# EAGLE board eBookReader (EAGLE 9.7.0)
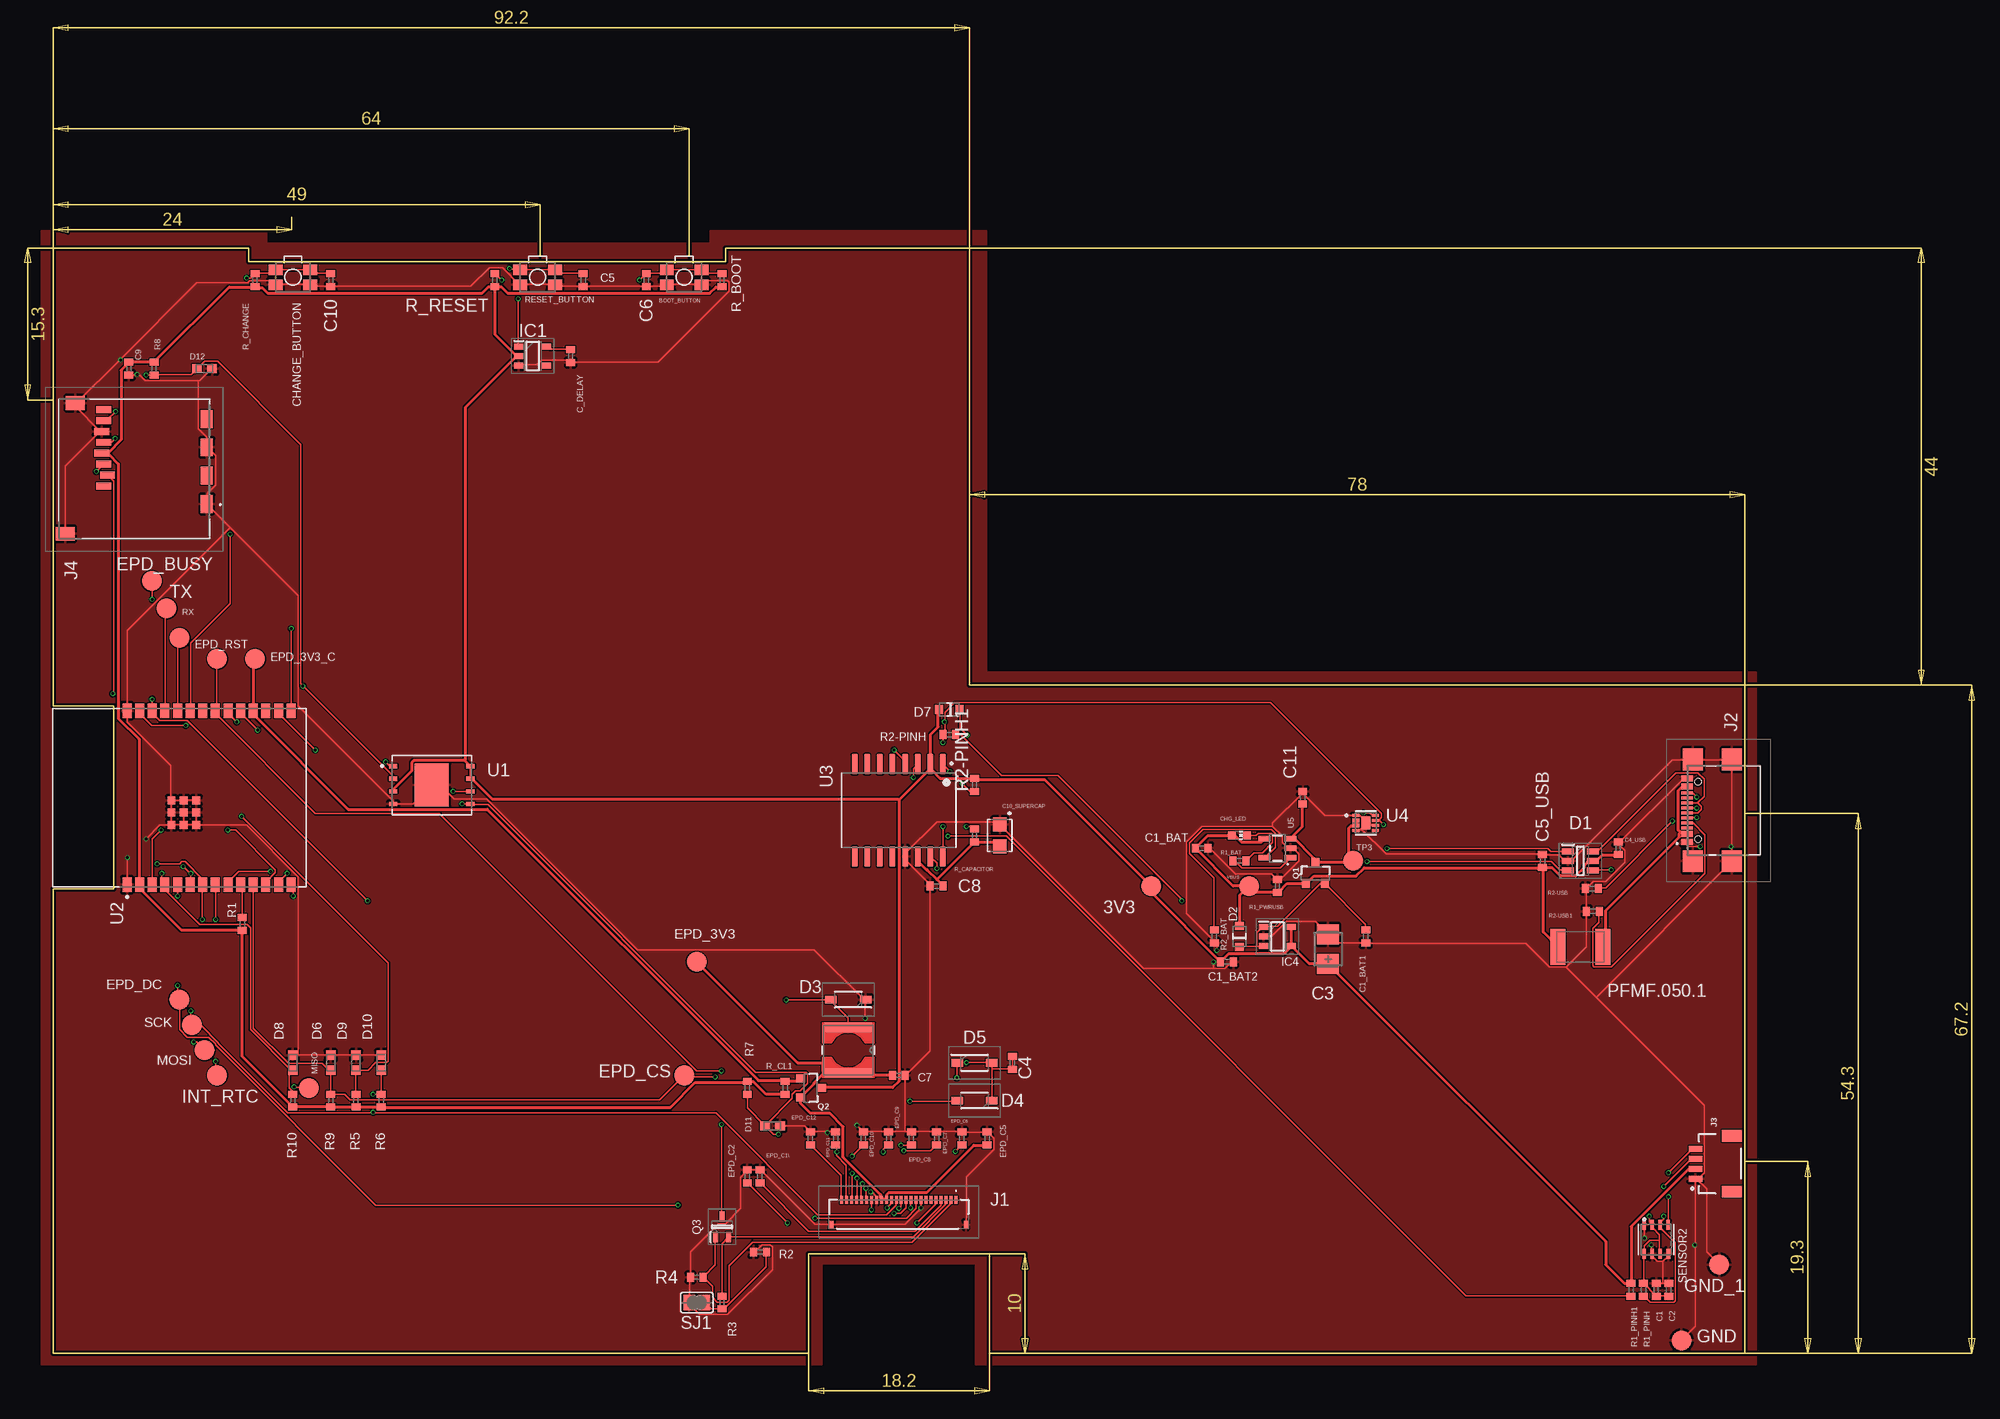
[diagram p0: board, top side]
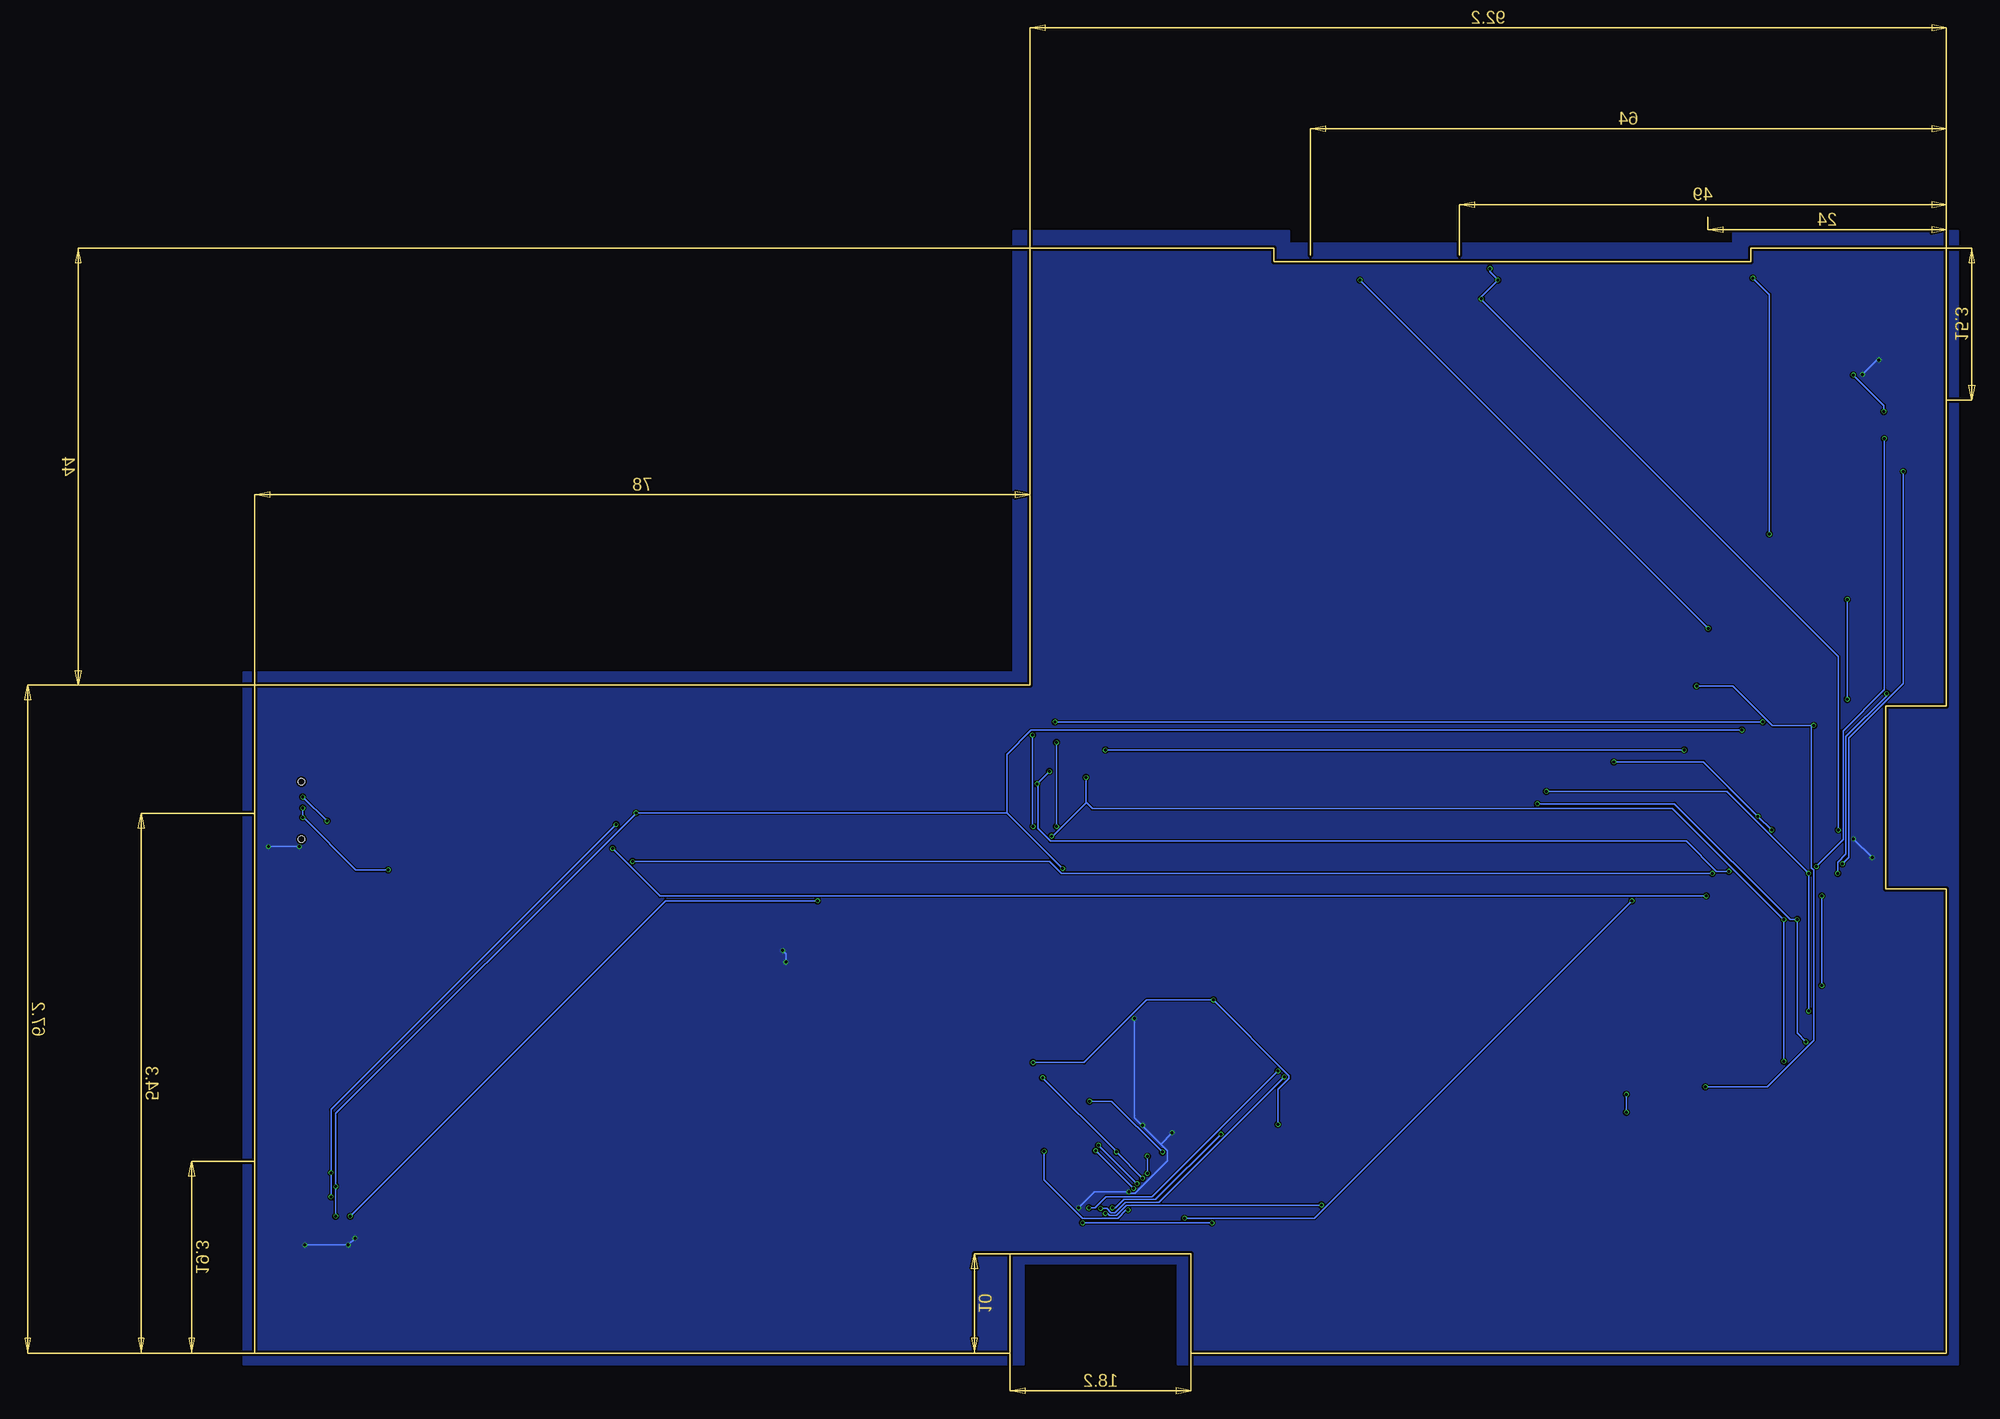
[diagram p1: board, bottom side, seen from below]

Size 170.2 x 111.2 mm. Coordinates in mm from the lower left corner, seen from the top.
Outline: 0,111.2 19.68,111.2 19.68,109.8 67.66,109.8 67.66,111.2 92.2,111.2 92.2,67.2 170.2,67.2 170.2,0 94.2,0 94.2,10 76,10 76,0 0,0 0,46.7 6.1,46.7 6.1,65.12 0,65.12 0,111.2
Copper layers (1*16): Top 0.035mm / dielectric 1.6mm / Bottom 0.035mm
Design rules "jlcpcb-2layers.dru *": minimum track width 0.15mm, minimum drill 0.3mm, track to track 5mil, track to pad 5mil, pad to pad 5mil, via to via 5mil, smd to smd 5mil, copper to edge 0.2mm, drill to drill 6mil, minimum pad ring 10mil, minimum via ring 3mil, stop-mask expansion 4mil, vias tented up to drill 0mil, thermal gap 10mil
Net classes: 1 custom: width 0.3 mm

## Footprints (pad centres in the part's own frame; a part is rotated, then mirrored left to right if it is on the bottom)
TP20R = smd 2 x 2: TP 0,0
MYBUTTON = smd 1.4 x 1.05: 1 1.75,0.75; 2 -1.75,0.75; 3 -1.75,-0.75; 4 1.75,-0.75
ESP32_WROVER_EAGLE-LTSPICE_C0402 = smd 0.7 x 0.9: 1 -0.65,0; 2 0.65,0
RCL_CT3528 = smd 2 x 2.2: + -1.5,0; - 1.5,0
CAPCP3225X100N = smd 1.4 x 1.4: 1 -1.1,0; 2 1.1,0
ADAFRUIT_CHIP-LED0603 = smd 0.8 x 0.8: A 0,-0.75; C 0,0.75
SOT95P280X145-6N = smd 1.2 x 0.6: 1 -1.25,0.95; 2 -1.25,0; 3 -1.25,-0.95; 4 1.25,-0.95; 5 1.25,0; 6 1.25,0.95
ESP32_WROVER_AVX---SD0805S020S1R0_AVX_SD0805S020S1R0_0 = smd 0.8 x 0.9: 1 -1.05,0; 2 1.05,0
SOD3716X135N = smd 1.15 x 0.8: 1 -1.75,0; 2 1.75,0
DIOC1608X36N = smd 0.97 x 0.94: 1 -0.75,0; 2 0.75,0
SOT95P280X125-5N = smd 0.9 x 0.6: 1 -1.4,0.95; 2 -1.4,0; 3 -1.4,-0.95; 4 1.4,-0.95; 5 1.4,0.95
SOT95P280X120-5N = smd 0.9 x 0.6: 1 -1.4,0.95; 2 -1.4,0; 3 -1.4,-0.95; 4 1.4,-0.95; 5 1.4,0.95
FH34SRJ24S05SH99 = smd 0.3 x 0.8: 1 5.75,1.45; 2 5.25,1.45; 3 4.75,1.45; 4 4.25,1.45; 5 3.75,1.45; 6 3.25,1.45; 7 2.75,1.45; 8 2.25,1.45; 9 1.75,1.45; 10 1.25,1.45; 11 0.75,1.45; 12 0.25,1.45; 13 -0.25,1.45; 14 -0.75,1.45; 15 -1.25,1.45; 16 -1.75,1.45; 17 -2.25,1.45; 18 -2.75,1.45; 19 -3.25,1.45; 20 -3.75,1.45; 21 -4.25,1.45; 22 -4.75,1.45; 23 -5.25,1.45; 24 -5.75,1.45 | smd 0.4 x 0.8: MP1 6.75,-1.05; MP2 -6.75,-1.05
SAMACSYS_PARTS_USB4110GFA = smd 0.3 x 1.15: A1 -3.35,3.678; A4 -2.55,3.678; A5 -1.25,3.678; A6 -0.25,3.678; A7 0.25,3.678; A8 1.25,3.678; A9 2.55,3.678; A12 3.35,3.678; B1 3.05,3.678; B4 2.25,3.678; B5 1.75,3.678; B6 0.75,3.678; B7 -0.75,3.678; B8 -1.75,3.678; B9 -2.25,3.678; B12 -3.05,3.678 | smd 2.18 x 2: MP1 -5.11,-0.827; MP2 5.11,-0.827; MP3 -5.11,3.103; MP4 5.11,3.103 | hole 0.65: -2.89,2.603; 2.89,2.603
JST04_1MM_RA = smd 0.6 x 1.35: 1 -1.5,0; 2 -0.5,0; 3 0.5,0; 4 1.5,0 | smd 1.2 x 2: NC1 2.8,-3.675; NC2 -2.8,-3.675
112ATAARR03ATTEND = smd 1.8 x 1.2: G1 10.6,10.4; G2 4.9,10.4; S1 7.75,10.4; S2 2.05,10.4 | smd 1.4 x 1.9: G3 13.6,-3.85; G4 0.45,-2.85 | smd 0.7 x 1.5: P1 8.8,0; P2 7.7,0.4; P3 6.6,0; P4 5.5,-0.2; P5 4.4,0; P6 3.3,-0.2; P7 2.2,0; P8 1.1,0
IND_4828-WE-TPC_WRE = smd 0.889 x 4.826: 1 -2.286,0; 2 2.286,0
ESP32C6_VARISTOR_CT/CN1812 = smd 1.5 x 3.6: 1 -2.25,0; 2 2.25,0
ESP32_WROVER_SPARKFUN-DISCRETESEMI_SOT23-3 = smd 0.8 x 0.9: 1 -0.95,-1; 2 0.95,-1; 3 0,1.1
SOT65P210X110-3N = smd 1.05 x 0.5: 1 -1.05,0.65; 2 -1.05,-0.65; 3 1.05,0
ESP32_WROVER_EAGLE-LTSPICE_R0402 = smd 0.7 x 0.9: 1 -0.65,0; 2 0.65,0
ESP32_WROVER_BME680_PSON80P300X300X100-8N = smd 1.016 x 0.5: 1 1.458,1.2; 2 1.458,0.4; 3 1.458,-0.4; 4 1.458,-1.2; 5 -1.458,-1.22; 6 -1.458,-0.4; 7 -1.458,0.4; 8 -1.458,1.2
SJ = smd 1.168 x 1.6: 1 -0.762,0; 2 0.762,0
SON127P600X800X80-9N = smd 0.94 x 0.44: 1 -3.895,1.905; 2 -3.895,0.635; 3 -3.895,-0.635; 4 -3.895,-1.905; 5 3.895,-1.905; 6 3.895,-0.635; 7 3.895,0.635; 8 3.895,1.905 | smd 3.4 x 4.3: 9 0,0
XCVR_ESP32-C6-WROOM-1-N8 = smd 1.5 x 0.9: 1 -8.75,5.26; 2 -8.75,3.99; 3 -8.75,2.72; 4 -8.75,1.45; 5 -8.75,0.18; 6 -8.75,-1.09; 7 -8.75,-2.36; 8 -8.75,-3.63; 9 -8.75,-4.9; 10 -8.75,-6.17; 11 -8.75,-7.44; 12 -8.75,-8.71; 13 -8.75,-9.98; 14 -8.75,-11.25; 15 8.75,-11.25; 16 8.75,-9.98; 17 8.75,-8.71; 18 8.75,-7.44; 19 8.75,-6.17; 20 8.75,-4.9; 21 8.75,-3.63; 22 8.75,-2.36; 23 8.75,-1.09; 24 8.75,0.18; 25 8.75,1.45; 26 8.75,2.72; 27 8.75,3.99; 28 8.75,5.26 | smd 0.8 x 0.8: 29_1 -2.755,0.79; 29_2 -1.505,0.79; 29_3 -0.255,0.79; 29_4 -2.755,-0.46; 29_5 -1.505,-0.46; 29_6 -0.255,-0.46; 29_7 -2.755,-1.71; 29_8 -1.505,-1.71; 29_9 -0.255,-1.71
SOIC127P1032X265-16N = smd 2.05 x 0.59: 1 -4.655,4.445; 2 -4.655,3.175; 3 -4.655,1.905; 4 -4.655,0.635; 5 -4.655,-0.635; 6 -4.655,-1.905; 7 -4.655,-3.175; 8 -4.655,-4.445; 9 4.655,-4.445; 10 4.655,-3.175; 11 4.655,-1.905; 12 4.655,-0.635; 13 4.655,0.635; 14 4.655,1.905; 15 4.655,3.175; 16 4.655,4.445
SON50P200X200X80-9N = smd 0.76 x 0.27: 1 -0.985,0.75; 4 -0.985,-0.75; 5 0.985,-0.75; 6 0.985,-0.25; 7 0.985,0.25; 8 0.985,0.75 | smd 0.813 x 0.406: 2 -0.985,0.25; 3 -0.985,-0.25 | smd 0.9 x 1.3: 9 0,0
ESP32_WROVER_SPARKFUN-IC-POWER_SOT23-5 = smd 0.55 x 1.2: 1 -0.95,-1.3; 2 0,-1.3; 3 0.95,-1.3; 4 0.95,1.3; 5 -0.95,1.3

## Placement (x,y rotation side)
3V3  TPTP20R  [TP20R]  110.49,46.99 0 top
BOOT_BUTTON  BOOT_BUTTON  [MYBUTTON]  63.5,108.25 180 top
C1  100nF  [ESP32_WROVER_EAGLE-LTSPICE_C0402]  161.29,6.35 90 top
C1_BAT  4.7uF  [ESP32_WROVER_EAGLE-LTSPICE_C0402]  115.57,50.8 0 top
C1_BAT1  4.7uF  [ESP32_WROVER_EAGLE-LTSPICE_C0402]  132.08,41.91 270 top
C1_BAT2  4.7uF  [ESP32_WROVER_EAGLE-LTSPICE_C0402]  118.11,39.37 0 top
C2  100nF  [ESP32_WROVER_EAGLE-LTSPICE_C0402]  162.56,6.35 90 top
C3  100uF TANT  [RCL_CT3528]  128.27,40.64 90 top
C4  4.7uF/25V  [ESP32_WROVER_EAGLE-LTSPICE_C0402]  96.52,29.21 270 top
C4_USB  100nF  [ESP32_WROVER_EAGLE-LTSPICE_C0402]  157.48,50.8 90 top
C5  1uF  [ESP32_WROVER_EAGLE-LTSPICE_C0402]  53.34,107.95 270 top
C5_USB  4.7uF  [ESP32_WROVER_EAGLE-LTSPICE_C0402]  149.86,49.53 90 top
C6  100nF  [ESP32_WROVER_EAGLE-LTSPICE_C0402]  59.69,107.95 270 top
C7  10uF  [ESP32_WROVER_EAGLE-LTSPICE_C0402]  85.09,27.94 0 top
C8  100nF  [ESP32_WROVER_EAGLE-LTSPICE_C0402]  88.9,46.99 180 top
C9  100nF  [ESP32_WROVER_EAGLE-LTSPICE_C0402]  7.62,99.06 270 top
C10  100nF  [ESP32_WROVER_EAGLE-LTSPICE_C0402]  27.94,107.95 270 top
C10_SUPERCAP  CPH3225ACPH  [CAPCP3225X100N]  95.25,52.07 270 top
C11  4.7uF  [ESP32_WROVER_EAGLE-LTSPICE_C0402]  125.73,55.88 90 top
C_DELAY  100nF  [ESP32_WROVER_EAGLE-LTSPICE_C0402]  52.07,100.33 270 top
CHANGE_BUTTON  CHANGE_BUTTON  [MYBUTTON]  24.13,108.25 180 top
CHG_LED  [ADAFRUIT_CHIP-LED0603]  119.38,52.07 270 top
D1  USBLC6-2SC6Y  [SOT95P280X145-6N]  153.67,49.53 0 top
D2  SD0805S020S1R0  [ESP32_WROVER_AVX---SD0805S020S1R0_AVX_SD0805S020S1R0_0]  119.38,41.91 90 top
D3  MBR0530  [SOD3716X135N]  80.01,35.56 180 top
D4  MBR0530  [SOD3716X135N]  92.71,25.4 180 top
D5  MBR0530  [SOD3716X135N]  92.71,29.21 0 top
D6  PGB1010603MR  [DIOC1608X36N]  27.94,29.21 90 top
D7  ESP32_WROVER_AVX---SD0805S020S1R0_AVX_SD0805S020S1R0_0_0AVX_SD0805S020S1R0_0_0  [ESP32_WROVER_AVX---SD0805S020S1R0_AVX_SD0805S020S1R0_0]  90.17,64.77 180 top
D8  PGB1010603MR  [DIOC1608X36N]  24.13,29.21 90 top
D9  PGB1010603MR  [DIOC1608X36N]  30.48,29.21 90 top
D10  PGB1010603MR  [DIOC1608X36N]  33.02,29.21 90 top
D11  PGB1010603MR  [DIOC1608X36N]  72.39,22.86 0 top
D12  PGB1010603MR  [DIOC1608X36N]  15.24,99.06 0 top
EPD_3V3  TPTP20R  [TP20R]  64.77,39.37 0 top
EPD_3V3_C  TPTP20R  [TP20R]  20.32,69.85 0 top
EPD_BUSY  TPTP20R  [TP20R]  9.93,77.7 0 top
EPD_C1\  1uF/50V  [ESP32_WROVER_EAGLE-LTSPICE_C0402]  71.12,17.78 90 top
EPD_C2  1uF/50V  [ESP32_WROVER_EAGLE-LTSPICE_C0402]  69.85,17.78 90 top
EPD_C5  0.1uF/50V  [ESP32_WROVER_EAGLE-LTSPICE_C0402]  93.98,21.59 90 top
EPD_C6  1uF/50V  [ESP32_WROVER_EAGLE-LTSPICE_C0402]  91.44,21.59 90 top
EPD_C7  1uF/50V  [ESP32_WROVER_EAGLE-LTSPICE_C0402]  88.9,21.59 90 top
EPD_C8  1uF/50V  [ESP32_WROVER_EAGLE-LTSPICE_C0402]  86.36,21.59 90 top
EPD_C9  1uF/50V  [ESP32_WROVER_EAGLE-LTSPICE_C0402]  84.06,21.59 90 top
EPD_C10  1uF/50V  [ESP32_WROVER_EAGLE-LTSPICE_C0402]  81.52,21.59 90 top
EPD_C11  1uF/50V  [ESP32_WROVER_EAGLE-LTSPICE_C0402]  78.74,21.59 90 top
EPD_C12  1uF/50V  [ESP32_WROVER_EAGLE-LTSPICE_C0402]  76.2,21.59 90 top
EPD_CS  TPTP20R  [TP20R]  63.5,27.94 0 top
EPD_DC  TPTP20R  [TP20R]  12.7,35.56 0 top
EPD_RST  TPTP20R  [TP20R]  16.51,69.85 0 top
GND  TPTP20R  [TP20R]  163.83,1.28 0 top
GND_1  TPTP20R  [TP20R]  167.64,8.9 0 top
IC1  BD5229G-TR  [SOT95P280X125-5N]  48.26,100.33 0 top
IC4  XC6220A331MR-G  [SOT95P280X120-5N]  123.19,41.91 0 top
INT_RTC  TPTP20R  [TP20R]  16.51,27.94 0 top
J1  FH34SRJ-24S-0.5SH_99_FH34  [FH34SRJ24S05SH99]  85.09,13.97 0 top
J2  SAMACSYS_PARTS_USB4110-GF-A  [SAMACSYS_PARTS_USB4110GFA]  168.1,54.61 90 top
J3  QWIIC_RIGHT_ANGLE  [JST04_1MM_RA]  165.25,19.05 90 top
J4  112A-TAAR-R03_ATTEND  [112ATAARR03ATTEND]  5.08,96.04 270 top
L1  68uH  [IND_4828-WE-TPC_WRE]  80.01,30.48 270 top
MISO  TPTP20R  [TP20R]  25.73,26.67 0 top
MOSI  TPTP20R  [TP20R]  15.24,30.48 0 top
PFMF.050.1  ESP32C6_VARISTOR  [ESP32C6_VARISTOR_CT/CN1812]  153.67,40.87 180 top
Q1  20V/4.2A/52mΩ/1.4W  [ESP32_WROVER_SPARKFUN-DISCRETESEMI_SOT23-3]  127,48.26 0 top
Q2  20V/4.2A/52mΩ/1.4W  [ESP32_WROVER_SPARKFUN-DISCRETESEMI_SOT23-3]  76.2,26.67 270 top
Q3  SI1308EDL-T1-GE3  [SOT65P210X110-3N]  67.31,12.7 90 top
R1  10K  [ESP32_WROVER_EAGLE-LTSPICE_R0402]  19.05,43.18 90 top
R1_BAT  200  [ESP32_WROVER_EAGLE-LTSPICE_R0402]  119.38,49.53 0 top
R1_PINH  10K  [ESP32_WROVER_EAGLE-LTSPICE_R0402]  160.02,6.35 90 top
R1_PINH1  10K  [ESP32_WROVER_EAGLE-LTSPICE_R0402]  158.75,6.35 90 top
R1_PWRUSB  100K  [ESP32_WROVER_EAGLE-LTSPICE_R0402]  123.19,46.99 270 top
R2  2.2  [ESP32_WROVER_EAGLE-LTSPICE_R0402]  71.12,10.16 0 top
R2-PINH  10K  [ESP32_WROVER_EAGLE-LTSPICE_R0402]  90.17,62.23 0 top
R2-PINH1  10K  [ESP32_WROVER_EAGLE-LTSPICE_R0402]  92.71,57.15 90 top
R2-USB  5k1  [ESP32_WROVER_EAGLE-LTSPICE_R0402]  154.83,46.75 180 top
R2-USB1  5k1  [ESP32_WROVER_EAGLE-LTSPICE_R0402]  154.94,44.45 0 top
R2_BAT  2K  [ESP32_WROVER_EAGLE-LTSPICE_R0402]  116.84,41.91 90 top
R3  0.47  [ESP32_WROVER_EAGLE-LTSPICE_R0402]  67.31,5.08 270 top
R4  10K  [ESP32_WROVER_EAGLE-LTSPICE_R0402]  64.77,7.62 180 top
R5  10K  [ESP32_WROVER_EAGLE-LTSPICE_R0402]  30.48,25.4 270 top
R6  10K  [ESP32_WROVER_EAGLE-LTSPICE_R0402]  33.02,25.4 270 top
R7  10K  [ESP32_WROVER_EAGLE-LTSPICE_R0402]  69.85,26.67 90 top
R8  10K  [ESP32_WROVER_EAGLE-LTSPICE_R0402]  10.16,99.06 90 top
R9  10K  [ESP32_WROVER_EAGLE-LTSPICE_R0402]  27.94,25.4 270 top
R10  10K  [ESP32_WROVER_EAGLE-LTSPICE_R0402]  24.13,25.4 270 top
R_BOOT  10K  [ESP32_WROVER_EAGLE-LTSPICE_R0402]  67.31,107.95 90 top
R_CAPACITOR  15  [ESP32_WROVER_EAGLE-LTSPICE_R0402]  92.71,52.07 90 top
R_CHANGE  10K  [ESP32_WROVER_EAGLE-LTSPICE_R0402]  20.32,107.95 90 top
R_CL1  10K  [ESP32_WROVER_EAGLE-LTSPICE_R0402]  73.66,26.67 90 top
R_RESET  10K  [ESP32_WROVER_EAGLE-LTSPICE_R0402]  44.45,107.95 90 top
RESET_BUTTON  RESET_BUTTON  [MYBUTTON]  48.75,108.25 180 top
RX  TPTP20R  [TP20R]  12.73,71.95 0 top
SCK  TPTP20R  [TP20R]  13.97,33.02 0 top
SENSOR2  BME688  [ESP32_WROVER_BME680_PSON80P300X300X100-8N]  161.29,11.43 90 top
SJ1  [SJ]  64.77,5.08 0 top
TP3  TPTP20R  [TP20R]  130.81,49.53 0 top
TX  TPTP20R  [TP20R]  11.43,74.93 0 top
U1  W25Q512JVEIQ  [SON127P600X800X80-9N]  38.1,57.15 0 top
U2  ESP32-C6-WROOM-1-N8  [XCVR_ESP32-C6-WROOM-1-N8]  12.7,55.88 90 top
U3  DS3231SN#  [SOIC127P1032X265-16N]  85.09,54.61 270 top
U4  MAX17048G+T10  [SON50P200X200X80-9N]  132.08,53.34 0 top
U5  MCP73831  [ESP32_WROVER_SPARKFUN-IC-POWER_SOT23-5]  123.19,50.8 90 top
VBUS  TPTP20R  [TP20R]  120.34,46.99 0 top

## Library data of the parts
3V3 BOOT_BUTTON C1 C1_BAT C1_BAT1 C1_BAT2 C2 C4 C4_USB C5 C5_USB C6-C10 C10_SUPERCAP C11 C_DELAY CHANGE_BUTTON CHG_LED EPD_3V3 EPD_3V3_C EPD_BUSY EPD_C1\ EPD_C2 EPD_C5-EPD_C12 EPD_CS EPD_DC EPD_RST GND GND_1 INT_RTC J1 MISO MOSI PFMF.050.1 R1 R1_BAT R1_PINH R1_PINH1 R1_PWRUSB R2 R2-PINH R2-PINH1 R2-USB R2-USB1 R2_BAT R3-R10 R_BOOT R_CAPACITOR R_CHANGE R_CL1 R_RESET RESET_BUTTON RX SCK SJ1 TP3 TX VBUS = DeskAssistant v19 v1
C3 = DeskAssistant v19 v1; SPICEPREFIX: C
D1 = DeskAssistant v19 v1; AVAILABILITY: In Stock; CHECK_PRICES: https://www.snapeda.com/parts/USBLC6-2SC6Y/STMicroelectronics/view-part/?ref=eda; DESCRIPTION: 17V Clamp 5A (8/20µs) Ipp Tvs Diode Surface Mount SOT-23-6; MF: STMicroelectronics; MP: USBLC6-2SC6Y; PACKAGE: SOT-23-6 STMicroelectronics; PRICE: None; SNAPEDA_LINK: https://www.snapeda.com/parts/USBLC6-2SC6Y/STMicroelectronics/view-part/?ref=snap
D2 D7 = DeskAssistant v19 v1; CENTROID_NOT_SPECIFIED: No; DATASHEET: http://datasheets.avx.com/schottky.pdf; DIGIKEY_DESCRIPTION: DIODE SCHOTTKY 20V 1A 0805; DIGIKEY_PART_NUMBER: 478-7800-1-ND; LEAD_FREE: yes; MF: AVX; MOUSER_PART_NUMBER: 581-SD0805S020S1R0; PACKAGE: 0805 (2012 metric); PREFIX: D; ROHS: yes; TEMPERATURE_RANGE_HIGH: +125°C; TEMPERATURE_RANGE_LOW: -55°C
D3-D5 = DeskAssistant v19 v1; AVAILABILITY: In Stock; CHECK_PRICES: https://www.snapeda.com/parts/MBR0530/Onsemi/view-part/?ref=eda; DESCRIPTION: Diode Schottky 30 V 500mA Surface Mount SOD-123; MF: ON Semiconductor; MP: MBR0530; PACKAGE: SOD-123-2 ON Semiconductor; PRICE: None; PURCHASE-URL: https://www.snapeda.com/api/url_track_click_mouser/?unipart_id=179458&manufacturer=ON Semiconductor&part_name=MBR0530&search_term=None; SNAPEDA_LINK: https://www.snapeda.com/parts/MBR0530/Onsemi/view-part/?ref=snap
D6 D8-D12 = DeskAssistant v19 v1; AVAILABILITY: In Stock; CHECK_PRICES: https://www.snapeda.com/parts/PGB1010603MR/Littelfuse/view-part/?ref=eda; DESCRIPTION: 150V (Typ) Clamp - Ipp Tvs Diode Surface Mount 0603 (1608 Metric); MF: Littelfuse Inc.; MP: PGB1010603MR; PACKAGE: 0603 Littelfuse Inc.; PRICE: None; PURCHASE-URL: https://www.snapeda.com/api/url_track_click_mouser/?unipart_id=5659453&manufacturer=Littelfuse Inc.&part_name=PGB1010603MR&search_term=None; SNAPEDA_LINK: https://www.snapeda.com/parts/PGB1010603MR/Littelfuse/view-part/?ref=snap
IC1 = DeskAssistant v19 v1; DESCRIPTION: Voltage Detector with Adjustable Delay Time: CMOS processes are utilized to develop high precision, low current consumption CMOS reset ICs that allow arbitrary setting of the delay time. The extensive lineup includes both Nch Open Drain and CMOS output types in a wide range of detection voltages (from 2.3V to 6.0V, in 0.1V steps), enabling selection of the ideal solution based on customer requirements. In addition, the entire series is of course both lead-free and RoHS-compliant.; HEIGHT: 1.25mm; MANUFACTURER_NAME: ROHM Semiconductor; MANUFACTURER_PART_NUMBER: BD5229G-TR; MOUSER_PART_NUMBER: 755-BD5229G-TR; MOUSER_PRICE-STOCK: https://www.mouser.co.uk/ProductDetail/ROHM-Semiconductor/BD5229G-TR?qs=4kLU8WoGk0vvnhrrYwdszw%3D%3D
IC4 = DeskAssistant v19 v1; DESCRIPTION: LDO Voltage Regulators; HEIGHT: 1.2mm; MANUFACTURER_NAME: Torex; MANUFACTURER_PART_NUMBER: XC6220A331MR-G; MOUSER_PART_NUMBER: 865-XC6220A331MR-G; MOUSER_PRICE-STOCK: https://www.mouser.co.uk/ProductDetail/Torex-Semiconductor/XC6220A331MR-G?qs=AsjdqWjXhJ8ZSWznL1J0gg%3D%3D
J2 = DeskAssistant v19 v1; DESCRIPTION: CONN USB 2.0 TYPE-C R/A SMT; HEIGHT: 3.26mm; MANUFACTURER_NAME: GCT (GLOBAL CONNECTOR TECHNOLOGY); MANUFACTURER_PART_NUMBER: USB4110-GF-A; MOUSER_PART_NUMBER: 640-USB4110-GF-A; MOUSER_PRICE-STOCK: https://www.mouser.co.uk/ProductDetail/GCT/USB4110-GF-A?qs=KUoIvG%2F9IlYiZvIXQjyJeA%3D%3D
J3 = DeskAssistant v19 v1; PROD_ID: CONN-13694
J4 = DeskAssistant v19 v1; DESCRIPTION: Micro SD Card Socket, Push-Push Type, Top Mount, SMT, H=1.83mm, 10u; HEIGHT: 1.9mm; MANUFACTURER_NAME: ATTEND; MANUFACTURER_PART_NUMBER: 112A-TAAR-R03 ATTEND
L1 = DeskAssistant v19 v1; COPYRIGHT: Copyright (C) 2024 Ultra Librarian. All rights reserved.; MANUFACTURER_PART_NUMBER: 744043680; MFR_NAME: Wurth Electronics
Q1 Q2 = DeskAssistant v19 v1; PROD_ID: TRAN-14388
Q3 = DeskAssistant v19 v1; AVAILABILITY: In Stock; CHECK_PRICES: https://www.snapeda.com/parts/SI1308EDL-T1-GE3/Vishay+Siliconix/view-part/?ref=eda; DESCRIPTION: Si1308EDL-T1-GE3 N-channel MOSFET Transistor, 1.5 A, 30 V, 3-Pin SC-70 | Siliconix / Vishay SI1308EDL-T1-GE3; MF: Vishay Siliconix; MP: SI1308EDL-T1-GE3; PACKAGE: SOT-323 Vishay Semiconductor; PRICE: None; PURCHASE-URL: https://www.snapeda.com/api/url_track_click_mouser/?unipart_id=274603&manufacturer=Vishay Siliconix&part_name=SI1308EDL-T1-GE3&search_term=None; SNAPEDA_LINK: https://www.snapeda.com/parts/SI1308EDL-T1-GE3/Vishay+Siliconix/view-part/?ref=snap
SENSOR2 = DeskAssistant v19 v1; AVAILABILITY: Unavailable; DESCRIPTION: Integrated Environmental Unit; MF: Bosch Sensortec; MP: BME680; PACKAGE: LGA-8 Bosch Tools; PRICE: None
U1 = DeskAssistant v19 v1; AVAILABILITY: In Stock; CHECK_PRICES: https://www.snapeda.com/parts/W25Q512JVEIQ/Winbond+Electronics/view-part/?ref=eda; DESCRIPTION: FLASH - NOR Memory IC 512Mb (64M x 8) SPI - Quad I/O 133 MHz 8-WSON (8x6); MF: Winbond Electronics; MP: W25Q512JVEIQ; PACKAGE: Package; PRICE: None; SNAPEDA_LINK: https://www.snapeda.com/parts/W25Q512JVEIQ/Winbond+Electronics/view-part/?ref=snap
U2 = DeskAssistant v19 v1; AVAILABILITY: In Stock; CHECK_PRICES: https://www.snapeda.com/parts/ESP32-C6-WROOM-1-N8/Espressif+Systems/view-part/?ref=eda; DESCRIPTION: Multiprotocol Modules ESP32-C6 module, Wi-Fi 6 in 2.4 GHz band, Bluetooth 5, Zigbee 3.0 and Thread. ESP34-WROOM Compatible - ENGINEERING SAMPLE; MF: Espressif Systems; MP: ESP32-C6-WROOM-1-N8; PACKAGE: None; PRICE: None; SNAPEDA_LINK: https://www.snapeda.com/parts/ESP32-C6-WROOM-1-N8/Espressif+Systems/view-part/?ref=snap
U3 = DeskAssistant v19 v1; AVAILABILITY: In Stock; CHECK_PRICES: https://www.snapeda.com/parts/DS3231SN%23/Analog+Devices/view-part/?ref=eda; DESCRIPTION: Extremely Accurate I²C-Integrated RTC/TCXO/Crystal; MF: Analog Devices; MP: DS3231SN#; PACKAGE: SOIC-16 Maxim; PRICE: None; PURCHASE-URL: https://www.snapeda.com/api/url_track_click_mouser/?unipart_id=99048&manufacturer=Analog Devices&part_name=DS3231SN#&search_term=None; SNAPEDA_LINK: https://www.snapeda.com/parts/DS3231SN%23/Analog+Devices/view-part/?ref=snap
U4 = DeskAssistant v19 v1; AVAILABILITY: In Stock; CHECK_PRICES: https://www.snapeda.com/parts/MAX17048G+T10/Analog+Devices/view-part/?ref=eda; DESCRIPTION: 3µA 1-Cell/2-Cell Fuel Gauge with ModelGauge; MF: Analog Devices; MP: MAX17048G+T10; PACKAGE: TDFN-8 Maxim; PRICE: None; PURCHASE-URL: https://www.snapeda.com/api/url_track_click_mouser/?unipart_id=329239&manufacturer=Analog Devices&part_name=MAX17048G+T10&search_term=None; SNAPEDA_LINK: https://www.snapeda.com/parts/MAX17048G+T10/Analog+Devices/view-part/?ref=snap
U5 = DeskAssistant v19 v1; PROD_ID: IC-09995

## Nets
3V3 [custom]: 3V3.TP C1_BAT2.1 C3.+ C9.1 D7.2 IC1.2 IC4.4 IC4.5 J3.2 J4.P4 Q2.3 R1.1 R1_PINH1.2 R2-PINH1.2 R5.2 R6.2 R7.2 R8.2 R9.2 R10.2 R_BOOT.1 R_CHANGE.1 R_CL1.1 R_RESET.1 U1.3 U1.7 U1.8 U2.2 U3.2
12C_PW: C1.1 C2.1 R1_PINH.2 R2-PINH.2 SENSOR2.2 SENSOR2.6 SENSOR2.8
32KHZ: R2-PINH1.1 U2.9 U3.1
DN: D1.4 J2.A7 J2.B7
DP: D1.6 J2.A6 J2.B6
EPD_3V3 [custom]: C7.1 EPD_3V3.TP EPD_C5.1 J1.15 J1.16 L1.2 Q2.2
EPD_3V3_C [custom]: EPD_3V3_C.TP Q2.1 R_CL1.2 U2.18
EPD_BUSY: EPD_BUSY.TP J1.9 U2.26
EPD_CS: D6.1 EPD_CS.TP J1.12 R9.1 U2.11
EPD_DC: EPD_DC.TP J1.11 U2.5
EPD_RST: EPD_RST.TP J1.10 U2.21
FLASH_CS: D9.1 R5.1 U1.1 U2.12
GDR: J1.2 Q3.1 R4.1
GND: BOOT_BUTTON.1 BOOT_BUTTON.2 C1.2 C1_BAT1.2 C1_BAT2.2 C1_BAT.2 C2.2 C3.- C4_USB.2 C5.2 C5_USB.2 C6.2 C7.2 C8.2 C9.2 C10.2 C10_SUPERCAP.1 C11.2 C_DELAY.2 CHANGE_BUTTON.1 CHANGE_BUTTON.2 D1.2 D3.1 D6.2 D8.2 D9.2 D10.2 D11.2 D12.2 EPD_C1\.2 EPD_C2.2 EPD_C5.2 EPD_C6.2 EPD_C7.2 EPD_C8.2 EPD_C9.2 EPD_C10.2 EPD_C11.2 EPD_C12.2 GND.TP GND_1.TP IC1.3 IC4.2 J1.8 J1.17 J1.MP1 J1.MP2 J2.A1 J2.A12 J2.B1 J2.B12 J2.MP1 J2.MP2 J2.MP3 J2.MP4 J3.1 J4.G1 J4.G2 J4.G3 J4.G4 J4.P6 R1_PWRUSB.1 R2-USB1.1 R2-USB.2 R2.1 R2_BAT.1 R4.2 RESET_BUTTON.1 RESET_BUTTON.2 SENSOR2.1 SENSOR2.5 SENSOR2.7 SJ1.1 U1.4 U1.9 U2.1 U2.28 U2.29_1 U2.29_2 U2.29_3 U2.29_4 U2.29_5 U2.29_6 U2.29_7 U2.29_8 U2.29_9 U3.13 U4.1 U4.4 U4.6 U4.9 U5.2
GPIO8: R1.2 U2.10
I2C_PW: U2.17
INT_RTC: INT_RTC.TP R1_PINH1.1 U2.8 U3.3
IO/BOOT: BOOT_BUTTON.3 BOOT_BUTTON.4 C6.1 R_BOOT.2 U2.15
IO/CHANGE: C10.1 CHANGE_BUTTON.3 CHANGE_BUTTON.4 R_CHANGE.2 U2.23
MISO: D12.1 J4.P7 MISO.TP R8.1 U1.2 U2.27
MOSI: D11.1 J1.14 J4.P3 MOSI.TP R7.1 U1.5 U2.7
N$1: D7.1 R_CAPACITOR.2
N$2: EPD_C1\.1 J1.4
N$3: EPD_C8.1 J1.20
N$5: EPD_C2.1 J1.5
N$6: EPD_C6.1 J1.18
N$7: C_DELAY.1 IC1.5
N$8: EPD_C7.1 J1.19
N$9: EPD_C12.1 J1.24
N$10: EPD_C10.1 J1.22
N$11: J2.B5 R2-USB.1
N$12: C1_BAT1.1 D2.1 IC4.1 IC4.3 Q1.2
N$13: R2_BAT.2 U5.5
N$14: R1_BAT.1 U5.1
N$16: J2.A5 R2-USB1.2
N$17: CHG_LED.C R1_BAT.2
PREVGH: D5.1 EPD_C9.1 J1.21
PREVGL: D4.2 EPD_C11.1 J1.23
RESE: J1.3 Q3.2 R3.1
RESE': R2.2 R3.2 SJ1.2
RESET: C5.1 IC1.1 R_RESET.2 RESET_BUTTON.3 RESET_BUTTON.4 U2.3
RTC_RST: U2.16 U3.4
RX: RX.TP U2.24
SCK: D10.1 J1.13 J4.P5 R6.1 SCK.TP U1.6 U2.6
SCL: J3.4 R2-PINH.1 SENSOR2.4 U2.20 U3.16 U4.7
SDA: J3.3 R1_PINH.1 SENSOR2.3 U2.19 U3.15 U4.8
SRC: C4.1 C4.2 D3.2 D4.1 D5.2 L1.1 Q3.3
SS_SD: D8.1 J4.P2 R10.1 U2.4
TX: TX.TP U2.25
USB_D+: D1.1 U2.14
USB_D-: D1.3 U2.13
VBAT [custom]: C11.1 Q1.3 TP3.TP U4.2 U4.3 U5.3
VBUS [custom]: C1_BAT.1 C4_USB.1 C5_USB.1 CHG_LED.A D1.5 D2.2 PFMF.050.1.2 Q1.1 R1_PWRUSB.2 U5.4 VBUS.TP
VRTC [custom]: C8.1 C10_SUPERCAP.2 R_CAPACITOR.1 U3.14
VUSB [custom]: J2.A4 J2.A9 J2.B4 J2.B9 PFMF.050.1.1

## Tracks (layer width: path | path; a pad name or v marks a point on that pad's centre or on a via)
3V3
  Top 0.3: 85.11,55.68 85.11,27.35 84.48,26.73 77.35,26.73 Q2.3 | 85.11,55.68 88.22,58.79 88.22,59.21 U3.2 | U3.2 88.36,58.72 89.26,57.82 92.66,57.82 R2-PINH1.2 92.8,57.69 99.79,57.69 110.39,47.09 3V3.TP 110.52,46.95 110.52,46.33 117.38,39.47 C1_BAT2.1 117.52,39.4 118.28,40.16 123.82,40.16 124.58,40.93 IC4.4 | D7.2 89.06,64.75 89.06,63.02 88.29,62.26 88.29,59.42 U3.2 | J3.2 165.23,18.49 164.54,18.49 158.79,12.74 158.79,7.06 R1_PINH1.2 158.1,7 156.21,8.89 156.21,11.24 128.39,39.06 C3.+ 128.25,39.2 126.38,39.2 124.72,40.86 IC4.4 | IC4.5 124.58,42.8 124.58,41.06 IC4.4 | R_CL1.1 73.61,26.04 71.74,26.04 70.5,27.29 69.87,27.29 R7.2 69.73,27.21 64.61,27.21 62.12,24.72 33.17,24.72 R6.2 32.96,24.79 30.61,24.79 R5.2 30.47,24.79 28.05,24.79 R9.2 27.91,24.79 24.17,24.79 R10.2 24.03,24.86 19.04,29.85 19.04,42.38 R1.1 19.04,42.59 12.88,42.59 8.73,46.74 8.73,47.09 U2.2 8.66,47.23 8.66,61.77 6.58,63.85 6.58,89.47 5.61,90.44 J4.P4 4.92,90.58 5.54,90.58 6.86,91.89 6.86,98.89 7.55,99.58 C9.1 7.69,99.72 10.11,99.72 R8.2 10.25,99.79 17.73,107.27 20.29,107.27 R_CHANGE.1 20.43,107.2 21.05,107.2 21.61,106.64 43.15,106.64 43.8,107.3 R_RESET.1 | 41.41,59.62 36.29,59.62 36.08,59.42 36.08,58.59 34.21,56.72 34.21,56.58 U1.3 | 41.41,59.62 41.97,59.07 U1.8 42.03,58.93 42.03,57.82 U1.7 42.17,57.76 44.18,55.75 84.97,55.75 85.11,55.68 | R_RESET.1 44.46,107.27 44.46,102.49 46.6,100.34 46.81,100.34 IC1.2 46.54,100.2 41.48,95.15 41.48,59.76 41.41,59.62 | R_BOOT.1 67.24,107.27 66.69,107.27 66.06,106.64 45.76,106.64 45.1,107.3 R_RESET.1
12C_PW  (via drill 0.3)
  Top 0.15: C2.1 162.53,5.75 161.35,5.75 C1.1 161.28,5.75 160.04,6.99 R1_PINH.2 160.04,7.06 160.04,9.97 SENSOR2.8 160.11,10.04 160.11,10.8 160.66,11.36 161.63,11.36 | v113.57,45.5 113.57,45.64 101.11,58.1 95.43,58.1 91.34,62.19 90.86,62.19 R2-PINH.2 | v160.59,13.78 160.59,13.23 160.87,12.95 SENSOR2.2 160.94,12.88 160.94,12.6 161.63,11.91 161.63,11.36 | 161.63,11.36 161.63,9.97 SENSOR2.6
  Bottom 0.15: v113.57,45.5 128.87,45.5 v160.59,13.78
32KHZ  (via drill 0.3)
  Top 0.15: v91.48,57.27 92.24,56.51 92.66,56.51 R2-PINH1.1 | v90.23,58.52 89.54,59.21 U3.1 | v21.88,48.48 18.7,48.48 17.66,47.44 17.66,47.16 U2.9
  Bottom 0.15: v90.23,58.52 v91.48,57.27 91.41,57.27 91.41,52.77 90.16,51.52 26.18,51.52 23.13,48.48 v21.88,48.48
DN  (via drill 0.3)
  Top 0.15: v165.37,53.88 164.47,53.88 J2.B7 | v165.37,54.85 164.47,54.85 J2.A7 | v156.78,48.61 154.98,48.61 D1.4
  Bottom 0.15: v165.37,54.85 v165.37,53.88 165.3,53.88 160.04,48.61 v156.78,48.61
DP
  Top 0.15: 165.51,55.33 165.85,54.98 165.85,54.71 165.51,54.36 164.47,54.36 J2.A6 | 165.51,55.33 164.47,55.33 J2.B6 | D1.6 154.98,50.48 155.4,50.48 163.29,58.38 165.51,58.38 166.13,57.76 166.13,56.02 165.51,55.4 165.51,55.33
EPD_3V3
  Top 0.3: 83.38,15.44 83.79,15.44 J1.15 83.86,15.58 83.86,15.93 84.07,16.14 87.88,16.14 92.66,20.91 93.97,20.91 EPD_C5.1 | 83.38,15.44 J1.16 | 77.56,28.18 79.98,28.18 L1.2 80.12,28.12 80.26,27.98 84.42,27.98 C7.1 | 75.21,25.76 Q2.2 | 64.82,39.33 EPD_3V3.TP 74.93,29.21 77.47,29.21 77.49,29.09 77.49,28.32 77.56,28.18 | 83.38,15.44 83.27,15.55 83.27,15.94 79.5,19.7 79.5,22.78 78.15,24.13 76.2,24.13 75.2,25.13 Q2.2 | Q2.2 76.57,27.09 76.57,27.18 77.56,28.17 77.56,28.18
EPD_3V3_C
  Top 0.3: Q2.1 75.14,27.56 74.93,27.35 73.68,27.35 R_CL1.2 73.54,27.42 70.98,27.42 43.7,54.71 29.71,54.71 20.22,64.19 20.22,64.54 U2.18 20.15,64.68 20.15,69.67 20.29,69.8 EPD_3V3_C.TP
EPD_BUSY  (via drill 0.3)
  Top 0.15: v76.66,13.57 85.87,13.57 86.84,14.54 86.84,15.37 J1.9 | v31.65,45.5 13.5,63.64 10.73,63.64 10.04,64.33 10.04,64.61 U2.26 9.97,64.68 v9.97,65.79 | v9.97,75.83 9.97,77.7 EPD_BUSY.TP
  Bottom 0.15: v76.66,13.57 63.57,13.57 v31.65,45.5 | v9.97,65.79 v9.97,75.83
EPD_CS  (via drill 0.3)
  Top 0.15: U2.11 20.15,47.09 20.15,32.69 23.68,29.15 27.08,29.15 27.84,28.39 D6.1 27.91,28.39 27.91,26.11 R9.1 27.98,26.04 29.36,26.04 29.92,25.48 61.01,25.48 63.43,27.91 EPD_CS.TP 63.5,27.91 63.64,27.77 v66.62,27.77 | v85.11,14.54 85.32,14.75 85.32,15.37 J1.12
  Bottom 0.15: v85.11,14.54 84.48,14.54 84.07,14.13 83.65,14.13 82.61,15.17 79.22,15.17 v66.62,27.77
EPD_DC  (via drill 0.3)
  Top 0.15: v84.62,14.06 85.25,14.06 85.8,14.61 85.8,15.37 J1.11 | v62.88,14.89 32.48,14.89 16.34,31.02 16.34,31.09 15.65,31.79 13.5,31.79 12.74,32.55 12.74,35.52 EPD_DC.TP 12.67,35.59 12.53,35.73 v12.53,36.98 | v12.53,45.98 12.53,47.09 U2.5
  Bottom 0.15: v84.62,14.06 84.42,14.06 84.21,13.85 83.52,13.85 82.48,14.89 v62.88,14.89 | v12.53,36.98 v12.53,45.98
EPD_RST  (via drill 0.3)
  Top 0.15: v86.28,14.61 86.28,15.37 J1.10 | v67.24,28.39 64.75,28.39 38.85,54.29 26.38,54.29 16.34,64.33 16.34,64.61 U2.21 16.34,64.68 16.48,64.82 16.48,69.8 EPD_RST.TP
  Bottom 0.15: v86.28,14.61 85.66,14.61 84.55,15.72 79.92,15.72 v67.24,28.39
FLASH_CS  (via drill 0.3)
  Top 0.15: R5.1 30.47,26.11 30.47,28.39 D9.1 30.54,28.46 31.72,28.46 32.48,29.22 33.59,29.22 33.73,29.36 33.73,39.27 v18.97,54.02 | v33.45,59.49 33.86,59.07 34.14,59.07 U1.1 | v17.59,52.63 18.35,52.63 22.37,48.61 22.37,48.34 21.47,47.44 21.47,47.16 U2.12
  Bottom 0.15: v33.45,59.49 24.45,59.49 v18.97,54.02 v17.59,52.63
GDR
  Top 0.15: J1.2 90.3,15.37 90.3,15.03 86.42,11.15 70.36,11.15 68,8.79 68,5.33 67.8,5.12 66.83,5.12 66.34,5.61 66.34,6.72 65.44,7.62 R4.1 65.44,7.69 66.62,8.86 66.62,11.63 Q3.1
GND  (via drill 0.3)
  Top 0.15: J4.G3 1.25,82.48 1.25,89.26 4.71,92.73 J4.P6 4.85,92.8 4.71,92.8 2.29,95.22 2.29,95.56 J4.G4 2.35,95.56 6.75,99.96 | IC1.3 46.88,99.44 48.68,99.44 49.17,99.93 51.8,99.93 52.01,99.72 C_DELAY.2 52.08,99.72 60.87,99.72 68,106.85 68,107.75 67.86,107.89 65.65,107.89 65.3,107.55 BOOT_BUTTON.2 65.23,107.55 61.77,107.55 BOOT_BUTTON.1 61.7,107.48 61.56,107.34 59.69,107.34 C6.2 59.62,107.34 53.35,107.34 C5.2 53.28,107.34 50.69,107.34 50.55,107.48 RESET_BUTTON.2 50.48,107.55 47.02,107.55 RESET_BUTTON.1 46.95,107.48 45.22,109.21 43.9,109.21 42.03,107.34 27.98,107.34 C10.2 27.91,107.34 26.04,107.34 25.9,107.48 CHANGE_BUTTON.2 25.83,107.55 22.44,107.55 CHANGE_BUTTON.1 22.37,107.55 22.02,107.89 19.8,107.89 19.6,107.68 14.47,107.68 6.75,99.96 | D10.2 32.96,29.98 30.54,29.98 D9.2 30.47,29.98 27.98,29.98 D6.2 27.91,29.98 24.65,29.98 | 24.65,29.98 24.17,29.98 D8.2 | U2.29_9 14.4,55.68 13.23,55.68 U2.29_6 13.09,55.61 11.98,55.61 U2.29_3 | U2.29_1 11.91,53.18 11.91,54.36 U2.29_2 11.91,54.43 11.91,55.61 U2.29_3 | U2.29_4 13.16,53.18 11.98,53.18 U2.29_1 | U2.29_7 14.4,53.18 13.23,53.18 U2.29_4 | U2.29_5 13.16,54.36 13.16,53.25 U2.29_4 | U2.29_8 14.4,54.36 14.4,53.25 U2.29_7 | v7.48,49.86 7.48,47.16 U2.1 | v9.35,51.73 10.73,53.12 11.84,53.12 U2.29_1 | U2.29_3 11.84,55.68 11.84,59.14 7.48,63.5 7.48,64.61 U2.28 7.48,64.68 7.48,72.71 17.83,83.06 | 24.65,29.98 24.65,47.92 19.46,53.12 14.47,53.12 U2.29_7 | 8.45,98.4 8.73,98.4 9.28,97.85 14.61,97.85 | 8.45,98.4 7.69,98.4 C9.2 | 14.61,97.85 14.75,97.85 15.93,99.03 D12.2 | 14.61,97.85 14.61,93 15.44,92.17 15.44,91.2 J4.G2 15.51,91.13 16.34,90.3 16.34,87.32 15.51,86.49 15.51,85.45 J4.G1 15.51,85.39 17.83,83.06
  Top 0.15: 17.83,83.06 24.65,76.24 24.65,65.09 34.21,55.54 34.21,55.33 U1.4 34.21,55.26 36.22,55.26 38.09,57.13 U1.9 38.16,57.13 38.99,57.13 40.37,55.75 43.63,55.75 58.79,40.58 76.59,40.58 81.65,35.52 D3.1 81.72,35.52 v81.72,33.66 | v6.79,99.93 6.75,99.96 | v8.45,98.47 8.45,98.4 | 116.75,38.71 109.69,38.71 95.29,53.12 C10_SUPERCAP.1 95.22,53.18 94.94,53.46 88.92,53.46 85.73,50.28 85.73,50 U3.13 85.73,49.93 85.73,49.65 88.22,47.16 88.22,47.02 C8.2 88.22,46.95 88.22,30.4 85.8,27.98 C7.2 85.73,27.91 85.73,22.3 | 116.75,38.71 117.93,38.71 118.56,39.33 118.69,39.33 C1_BAT2.2 | J1.MP1 91.89,12.95 91.89,17.73 94.67,20.5 94.67,21.61 94.04,22.23 EPD_C5.2 93.9,22.23 91.48,22.23 EPD_C6.2 91.41,22.3 88.92,22.3 EPD_C7.2 88.85,22.3 86.42,22.3 EPD_C8.2 86.36,22.3 85.73,22.3 | 85.73,22.3 84.07,22.3 EPD_C9.2 84,22.3 81.58,22.3 EPD_C10.2 81.51,22.3 v80.88,22.92 | R2.1 70.5,10.18 70.64,10.18 71.33,10.87 72.16,10.87 72.37,10.66 72.37,8.38 67.86,3.88 65.03,3.88 64.06,4.85 64.06,5.05 SJ1.1 64.06,5.12 64.06,7.62 R4.2 64.13,7.69 64.13,10.18 66.97,13.02 67.66,13.02 69.18,14.54 69.18,17.66 69.87,18.35 EPD_C2.2 69.87,18.42 71.05,18.42 EPD_C1\.2 71.19,18.42 76.66,12.95 78.32,12.95 J1.MP2 78.39,12.95 85.73,12.95 87.32,14.54 v87.32,14.61 87.32,15.37 J1.8 | 77.91,22.3 78.74,22.3 EPD_C11.2 | 77.91,22.3 76.24,22.3 EPD_C12.2 76.17,22.3 75.62,22.85 73.2,22.85 D11.2 | v82.27,16.2 82.41,16.2 82.82,15.79 82.82,15.44 J1.17 | v77.91,22.16 77.91,22.3 | J2.B12 164.4,51.52 164.4,51.31 J2.A1 164.47,51.24 164.47,50.97 | 164.47,50.97 164.47,50 164.95,49.51 J2.MP3 | 168.9,50.97 168.9,59.69 J2.MP2 168.83,59.69 165.02,59.69 J2.MP4 164.95,59.69 162.94,59.69 152.84,49.58 152.49,49.58 D1.2 152.42,49.58 152.07,49.58 151.52,50.14 149.93,50.14 C5_USB.2 149.79,50.21 134.14,50.21 131.64,52.7 U4.9
  Top 0.15: 168.9,50.97 168.9,49.51 J2.MP1 168.9,49.44 155.26,35.8 | v165.72,50.97 164.47,50.97 | v168.83,50.97 168.9,50.97 | U4.4 131.16,52.63 131.51,52.63 132.06,53.18 132.06,53.32 U4.9 | U4.6 133.03,53.12 132.06,53.12 U4.9 | U4.9 132.06,53.39 132.06,53.53 131.51,54.08 131.16,54.08 U4.1 131.02,54.08 127.97,54.08 125.76,56.3 C11.2 125.69,56.51 125.69,56.3 122.71,53.32 122.71,52.98 | 122.71,52.98 115.58,52.98 114.06,51.45 114.06,44.25 116.83,41.48 116.83,41.27 R2_BAT.1 116.89,41.2 117.1,41 v117.1,40.51 | 122.71,52.98 123.68,52.01 123.68,51.38 124.23,50.83 124.44,50.83 U5.2 124.51,50.76 124.79,50.76 125.34,50.21 125.34,49.51 123.47,47.64 R1_PWRUSB.1 123.13,47.64 122.57,48.2 118.97,48.2 116.41,50.76 116.27,50.76 C1_BAT.2 | 161.98,6.99 162.53,6.99 C2.2 | 161.98,6.99 161.35,6.99 C1.2 | 161.98,9.21 161.42,9.21 160.94,9.7 160.94,9.97 SENSOR2.7 160.87,10.04 160.8,10.11 v160.8,10.87 | 161.98,9.21 162.46,9.7 162.46,9.97 SENSOR2.5 | v160.11,11.56 160.11,12.88 SENSOR2.1 | 161.98,9.21 161.98,6.99 | 165.23,10.87 165.23,2.7 163.84,1.32 GND.TP | 165.23,10.87 165.23,17.52 J3.1 165.3,17.59 | v165.16,10.87 165.23,10.87 | IC4.2 121.81,41.97 122.64,41.97 124.1,43.42 127,43.42 128.25,42.17 C3.- 128.32,42.1 129.15,41.27 132.06,41.27 C1_BAT1.2 132.13,41.2 148.19,41.2 150.55,38.85 152.28,38.85 | J2.A12 164.4,57.89 164.4,57.69 J2.B1 164.33,57.69 163.91,57.69 157.61,51.38 C4_USB.2 157.54,51.38 157.54,51.18 158.17,50.55 158.17,49.38 156.23,47.44 154.98,47.44 154.29,46.74 R2-USB.2 154.22,46.74 154.29,46.67 R2-USB1.1 154.29,44.39 154.29,40.86 152.28,38.85 | 165.3,17.59 165.58,17.59 166.13,18.14 166.13,24.93 155.26,35.8
  Top 0.15: 155.26,35.8 152.28,38.78 152.28,38.85 | v116.75,39.33 116.75,38.71 | GND_1.TP 166.37,10.17 166.37,16.52 165.3,17.59
  Bottom 0.15: v9.35,51.73 v7.48,49.86 | v6.79,99.93 6.99,99.93 v8.45,98.47 | v87.32,14.61 85.73,16.2 v82.27,16.2 82.2,16.2 82.06,16.07 81.65,16.07 78.39,19.32 78.39,20.36 79.05,21.02 | v81.72,33.66 81.72,23.68 80.92,22.89 | 79.05,21.02 80.92,22.89 | 79.05,21.02 v77.91,22.16 | v80.88,22.92 80.92,22.89 | v168.83,50.97 v165.72,50.97 | v160.11,11.56 v160.8,10.87 v165.16,10.87 | v116.75,39.33 116.75,40.16 v117.1,40.51
  pour Top: 77.43,8.95 77.45,8.97 92.73,8.97 92.75,8.95 92.77,8.93 92.79,8.91 92.79,-1.19 171.37,-1.19 171.37,68.5 93.96,68.5 93.94,68.52 93.92,68.54 93.9,68.56 93.9,112.95 66.12,112.95 66.12,111.74 66.1,111.72 66.08,111.7 66.06,111.68 21.57,111.68 21.55,111.7 21.53,111.72 21.51,111.74 21.51,112.95 -1.19,112.95 -1.19,-1.19 77.39,-1.19 77.39,8.91 77.41,8.93
  pour Bottom: 77.43,8.95 77.45,8.97 92.73,8.97 92.75,8.95 92.77,8.93 92.79,8.91 92.79,-1.19 171.37,-1.19 171.37,68.5 93.96,68.5 93.94,68.52 93.92,68.54 93.9,68.56 93.9,112.95 66.12,112.95 66.12,111.74 66.1,111.72 66.08,111.7 66.06,111.68 21.57,111.68 21.55,111.7 21.53,111.72 21.51,111.74 21.51,112.95 -1.19,112.95 -1.19,-1.19 77.39,-1.19 77.39,8.91 77.41,8.93
GPIO8
  Top 0.15: R1.2 19.04,46.95 18.91,47.09 U2.10
INT_RTC  (via drill 0.3)
  Top 0.15: v16.34,43.63 16.34,47.09 U2.8 | v16.34,29.36 16.34,28.12 16.48,27.98 INT_RTC.TP | v90.03,52.01 95.91,52.01 142.17,5.75 158.72,5.75 R1_PINH1.1 | v86.56,57.89 86.56,58.79 86.98,59.21 U3.3
  Bottom 0.15: v16.34,29.36 v16.34,43.63 16.41,43.63 27.56,54.78 85.94,54.78 86.49,55.33 86.56,55.33 | v90.03,52.01 89.89,52.01 86.56,55.33 | v86.56,57.89 86.56,55.33
IO/BOOT  (via drill 0.3)
  Top 0.15: R_BOOT.2 67.24,108.65 65.65,108.65 65.3,109 BOOT_BUTTON.3 65.23,109 61.77,109 BOOT_BUTTON.4 61.7,109 61.35,108.65 59.69,108.65 C6.1 59.62,108.58 v59,107.96 | v23.96,72.92 23.96,64.68 U2.15
  Bottom 0.15: v59,107.96 v23.96,72.92
IO/CHANGE  (via drill 0.3)
  Top 0.15: C10.1 27.91,108.65 26.25,108.65 25.9,109 CHANGE_BUTTON.3 25.83,109 22.44,109 CHANGE_BUTTON.4 22.37,109 22.02,108.65 20.36,108.65 R_CHANGE.2 20.29,108.58 19.88,108.17 v19.46,108.17 | v17.8,82.41 17.8,75.41 13.85,71.47 13.85,64.68 U2.23
  Bottom 0.15: v17.8,82.41 17.8,106.51 v19.46,108.17
MISO  (via drill 0.3)
  Top 0.15: 25.17,67.14 24.93,67.38 24.93,91.41 16.55,99.79 15.23,99.79 14.54,99.1 D12.1 14.47,99.03 13.92,98.47 10.18,98.47 R8.1 10.11,98.4 v9.35,98.4 | 25.17,67.14 34.14,58.17 34.14,57.82 U1.2 | v13.37,63.16 9.9,63.16 8.73,64.33 8.73,64.61 U2.27 | v25.14,67.1 25.17,67.14 | v6.3,94.73 5.47,93.9 5.12,93.9 J4.P7 | v24.24,26.8 24.31,26.73 25.69,26.73 MISO.TP
  Bottom 0.15: v25.14,67.1 21.47,67.1 17.52,63.16 v13.37,63.16 13.57,63.09 13.57,48.82 13.37,48.61 13.37,31.44 18,26.8 v24.24,26.8 | v6.3,94.73 6.3,95.36 v9.35,98.4
MOSI  (via drill 0.3)
  Top 0.15: v15.03,43.63 15.03,47.09 U2.7 15.03,47.16 15.03,47.71 13.3,49.44 12.95,49.44 12.74,49.24 v10.46,49.24 | v14.13,31.3 14.47,31.3 15.23,30.54 MOSI.TP | v4.36,88.71 5.05,89.4 J4.P3 | v83.93,14.61 84.28,14.96 84.28,15.37 J1.14 | v72.99,22.02 72.5,22.02 71.67,22.85 D11.1 | R7.1 69.87,25.97 69.87,24.65 71.61,22.92 D11.1 | D11.1 71.67,22.92 74.37,25.62 74.37,26.04 74.72,26.38 75.14,26.38 75.9,27.15 75.9,28.12 75.76,28.25 70.7,28.25 43.77,55.19 42.03,55.19 U1.5 41.97,55.26 v41.13,55.26
  Bottom 0.15: v14.13,31.3 15.03,32.2 v15.03,43.63 15.72,43.63 27.35,55.26 v41.13,55.26 | v4.36,88.71 4.36,67.38 9.83,61.91 9.83,49.86 v10.46,49.24 | v83.93,14.61 83.58,14.61 82.75,15.44 79.57,15.44 v72.99,22.02
N$1  (via drill 0.3)
  Top 0.15: v91.96,62.19 91.27,62.88 91.27,64.75 D7.1 | v91.89,52.98 92.45,52.98 92.66,52.77 R_CAPACITOR.2
  Bottom 0.15: v91.96,62.19 91.96,53.05 v91.89,52.98
N$2
  Top 0.15: J1.4 89.33,15.37 89.33,14.89 86.7,12.26 76.04,12.26 71.19,17.11 EPD_C1\.1
N$3  (via drill 0.3)
  Top 0.15: v81.44,17.04 81.3,16.9 81.3,15.44 J1.20 | v85.32,20.91 86.36,20.91 EPD_C8.1
  Bottom 0.15: v85.32,20.91 v81.44,17.04
N$5  (via drill 0.3)
  Top 0.15: v86.91,13.09 88.78,14.96 88.78,15.37 J1.5 | v73.89,13.09 69.87,17.11 EPD_C2.1
  Bottom 0.15: v73.89,13.09 v86.91,13.09
N$6  (via drill 0.3)
  Top 0.15: v82.34,14.4 82.34,15.37 J1.18 | v90.79,20.29 91.41,20.91 EPD_C6.1
  Bottom 0.15: v82.34,14.4 82.55,14.4 83.38,13.57 86.91,13.57 90.79,17.45 v90.79,20.29
N$7
  Top 0.15: C_DELAY.1 52.01,101.04 49.93,101.04 49.72,101.24 IC1.5
N$8  (via drill 0.3)
  Top 0.15: v81.78,16.55 81.78,15.44 J1.19 | v85.59,20.36 88.29,20.36 88.85,20.91 EPD_C7.1
  Bottom 0.15: v85.59,20.36 v81.78,16.55
N$9
  Top 0.15: J1.24 79.29,15.44 79.29,17.87 76.24,20.91 EPD_C12.1
N$10  (via drill 0.3)
  Top 0.15: v80.4,18.07 80.4,15.44 J1.22 | v80.4,19.8 81.51,20.91 EPD_C10.1
  Bottom 0.15: v80.4,19.8 v80.4,18.07
N$11  (via drill 0.3)
  Top 0.15: v162.94,53.53 156.23,46.81 155.54,46.81 R2-USB.1 | v165.37,55.95 165.02,56.3 164.47,56.3 J2.B5
  Bottom 0.15: v165.37,55.95 v162.94,53.53
N$12
  Top 0.15: 121.12,40.93 121.74,40.93 IC4.3 | 121.12,40.93 119.39,40.93 D2.1 | 121.12,40.93 121.12,42.31 121.6,42.8 121.74,42.8 IC4.1 121.81,42.94 123.2,42.94 127.49,47.23 127.91,47.23 Q1.2 127.97,47.23 132.06,43.14 132.06,42.59 C1_BAT1.1
N$13
  Top 0.15: R2_BAT.2 116.83,42.59 116.83,47.78 114.33,50.28 114.33,51.31 115.72,52.7 122.57,52.7 122.99,52.28 122.99,50.9 121.95,49.86 U5.5
N$14
  Top 0.15: R1_BAT.1 118.76,49.51 118.9,49.51 119.59,48.82 123.47,48.82 124.44,49.79 U5.1
N$16
  Top 0.15: R2-USB1.2 155.54,44.39 155.54,43.35 154.91,42.73 154.91,38.99 155.05,38.85 156.78,38.85 166.2,48.27 166.2,52.15 165.02,53.32 164.47,53.32 J2.A5
N$17
  Top 0.15: CHG_LED.C 120.15,52.08 121.05,52.08 121.26,52.28 122.57,52.28 122.71,52.15 122.71,51.38 121.67,50.34 120.84,50.34 120.08,49.58 R1_BAT.2
PREVGH  (via drill 0.3)
  Top 0.15: v80.88,17.59 80.88,15.44 J1.21 | v83.52,20.22 83.52,20.43 84,20.91 EPD_C9.1 | v90.92,27.7 90.92,29.15 D5.1
  Bottom 0.15: v80.88,17.59 v83.52,20.22 83.52,20.29 v90.92,27.7
PREVGL  (via drill 0.3)
  Top 0.15: 78.81,20.22 78.81,20.91 EPD_C11.1 | 78.81,20.22 78.81,19.88 79.78,18.91 79.78,15.44 J1.23 | v86.22,25.35 90.92,25.35 D4.2 | v78.88,20.22 78.81,20.22
  Bottom 0.15: v86.22,25.35 84,25.35 v78.88,20.22
RESE
  Top 0.15: J1.3 89.82,15.37 89.82,14.96 86.56,11.7 68,11.7 Q3.2 67.93,11.63 67.31,11.01 67.31,5.75 R3.1
RESE'
  Top 0.15: SJ1.2 65.58,5.05 66.2,4.43 67.24,4.43 R3.2 67.38,4.43 67.52,4.43 71.74,8.66 71.74,10.11 R2.2
RESET  (via drill 0.3)
  Top 0.15: C5.1 53.28,108.65 50.9,108.65 50.55,109 RESET_BUTTON.3 50.48,109 47.02,109 RESET_BUTTON.4 46.95,109.07 45.98,109.07 v45.91,109.14 | v46.81,106.09 46.81,101.31 IC1.1 | v45.15,107.96 44.46,108.65 R_RESET.2 | v10.87,52.63 9.97,51.73 9.97,47.16 U2.3
  Bottom 0.15: v10.87,52.63 10.87,70.08 46.81,106.02 v46.81,106.09 46.81,106.3 v45.15,107.96 45.15,108.03 45.91,108.79 v45.91,109.14
RTC_RST  (via drill 0.3)
  Top 0.15: v26.38,60.66 22.71,64.33 22.71,64.61 U2.16 | v84.62,60.66 85.66,59.62 85.66,59.28 U3.4
  Bottom 0.15: v84.62,60.66 v26.38,60.66
RX
  Top 0.15: U2.24 12.53,64.68 12.53,71.74 12.67,71.88 RX.TP
SCK  (via drill 0.3)
  Top 0.15: v40.23,56.51 41.97,56.51 U1.6 | U2.6 13.85,47.16 v13.85,48.27 13.78,48.27 v13.09,48.96 | v6.23,92.03 5.89,91.69 5.12,91.69 J4.P5 | D10.1 33.03,28.39 33.03,26.11 R6.1 32.96,26.04 v32.2,26.04 | 32.2,24.17 23.61,24.17 16.62,31.16 16.62,31.23 14.89,32.96 13.99,32.96 SCK.TP 13.92,33.03 13.85,33.1 v13.85,34.42 | 32.2,24.17 66.69,24.17 76.94,13.92 83.86,13.92 84.83,14.89 84.83,15.37 J1.13 | v32.2,24.24 32.2,24.17
  Bottom 0.15: v40.23,56.51 22.09,56.51 v13.85,48.27 v13.85,34.42 | v6.23,92.03 6.23,66.76 10.39,62.6 10.39,51.66 v13.09,48.96 | v32.2,24.24 v32.2,26.04
SCL  (via drill 0.3)
  Top 0.15: v162.53,15.72 162.53,12.95 SENSOR2.4 | v162.53,18.14 164.88,20.5 165.23,20.5 J3.4 | 89.75,63.5 89.75,62.46 89.54,62.26 R2-PINH.1 89.54,62.19 v89.54,61.42 | 89.75,63.5 89.75,64.47 90.72,65.44 122.5,65.44 133.65,54.29 133.65,53.88 133.38,53.6 133.1,53.6 U4.7 133.44,53.6 v133.86,53.18 | v18.49,63.5 17.66,64.33 17.66,64.61 U2.20 | v89.68,63.5 89.75,63.5 | v89.54,52.98 89.54,50 U3.16
  Bottom 0.15: v162.53,15.72 v162.53,18.14 162.53,24.52 v133.86,53.18 | v89.68,63.5 v18.49,63.5 | v89.54,61.42 v89.54,52.98
SDA  (via drill 0.3)
  Top 0.15: R1_PINH.1 160.04,5.68 160.18,5.68 160.73,5.12 163.08,5.12 163.22,5.26 163.22,11.08 161.7,12.6 SENSOR2.3 161.7,12.95 161.7,13.16 162.04,13.5 v162.04,13.78 | v162.04,16.76 164.81,19.53 165.23,19.53 J3.3 | v131.85,54.36 132.47,54.36 132.68,54.15 133.03,54.15 U4.8 | v88.92,48.75 88.92,49.31 88.29,49.93 U3.15 | v20.57,62.67 18.91,64.33 18.91,64.61 U2.19
  Bottom 0.15: v162.04,13.78 v162.04,16.76 162.04,24.1 131.85,54.29 v131.85,54.36 94.53,54.36 | v88.92,48.75 94.53,54.36 | v20.57,62.67 92.1,62.67 94.53,60.25 94.53,54.36
SRC  (via drill 0.3)
  Top 0.15: C4.1 96.53,29.85 96.53,28.6 C4.2 96.47,28.6 94.46,28.6 | 94.46,28.6 94.46,29.15 D5.2 94.39,29.22 v91.89,29.22 | 94.46,28.6 94.46,25.41 D4.1 | v67.24,22.99 67.24,13.78 Q3.3 | v73.75,35.52 78.25,35.52 D3.2 78.25,35.46 79.98,33.73 79.98,32.83 L1.1
  Bottom 0.15: v67.24,22.99 67.24,26.52 66.13,27.63 66.13,27.91 v73.75,35.52 80.47,35.52 86.77,29.22 v91.89,29.22
SS_SD  (via drill 0.3)
  Top 0.15: R10.1 24.1,26.11 24.1,26.32 23.75,26.66 23.75,28.05 24.1,28.39 D8.1 24.03,28.39 19.88,32.55 19.88,42.8 19.53,43.14 14.75,43.14 11.29,46.6 11.29,47.09 U2.4 11.22,47.16 10.94,47.44 v10.94,48.27 | v6.03,66.34 6.09,66.41 6.09,87.74 5.54,88.29 J4.P2
  Bottom 0.15: v6.03,66.34 6.03,66.13 10.11,62.05 10.11,50.21 10.94,49.38 v10.94,48.27
TX
  Top 0.15: U2.25 11.29,64.68 11.29,74.79 TX.TP
USB_D+  (via drill 0.3)
  Top 0.15: v134.21,50.76 150.41,50.76 150.69,50.48 D1.1 | v24.17,45.98 24.17,46.88 23.96,47.09 U2.14
  Bottom 0.15: v134.21,50.76 129.43,45.98 v24.17,45.98
USB_D-  (via drill 0.3)
  Top 0.15: v132.2,49.44 150.76,49.44 151.59,48.61 152.42,48.61 D1.3 | v23.55,48.27 22.71,47.44 22.71,47.16 U2.13
  Bottom 0.15: v132.2,49.44 90.23,49.44 89.06,48.27 v23.55,48.27
VBAT
  Top 0.3: C11.1 125.69,55.19 125.69,52.98 124.51,51.8 U5.3 124.79,51.87 126.94,49.72 126.94,49.51 Q1.3 127,49.38 130.61,49.38 130.74,49.51 TP3.TP 130.4,49.51 130.4,52.84 130.61,53.05 130.95,53.05 U4.3 131.09,53.12 131.09,53.53 U4.2
VBUS
  Top 0.3: 149.93,48.82 150.83,48.82 151.66,47.99 153.18,47.99 154.01,48.82 154.01,49.03 154.5,49.51 154.91,49.51 D1.5 155.05,49.58 155.33,49.58 155.88,50.14 157.47,50.14 C4_USB.1 | 149.93,48.82 C5_USB.1 149.72,48.82 131.92,48.82 131.09,47.99 126.87,47.99 126.17,47.3 Q1.1 126.03,47.23 124.17,47.23 123.33,46.4 R1_PWRUSB.2 123.13,46.4 120.91,46.4 120.43,46.88 VBUS.TP | 151.45,40.93 PFMF.050.1.2 149.93,42.37 149.93,48.82 | U5.4 121.88,51.73 121.53,51.38 119.59,51.38 118.97,52.01 118.69,52.01 CHG_LED.A 118.49,52.01 116.13,52.01 114.95,50.83 C1_BAT.1 118.73,46.99 VBUS.TP | D2.2 119.39,43 119.39,46.05 120.29,46.95 VBUS.TP | 120.7,47.37 120.43,47.09 VBUS.TP
VRTC
  Top 0.3: C10_SUPERCAP.2 95.22,51.04 94.87,51.38 92.73,51.38 R_CAPACITOR.1 92.59,51.31 88.92,47.64 | 88.92,47.64 87.95,48.61 87.88,48.61 87.05,49.44 87.05,49.93 U3.14 | 88.92,47.64 89.54,47.02 C8.1
VUSB
  Top 0.3: J2.A4 164.4,52.08 164.4,52.35 J2.B9 164.26,52.42 163.71,52.42 | J2.A9 164.4,57.13 164.4,56.92 J2.B4 164.26,56.85 163.78,56.85 163.5,56.58 163.5,52.63 163.71,52.42 | 163.71,52.42 163.64,52.28 163.64,51.94 156.23,44.53 156.23,41.2 155.95,40.93 PFMF.050.1.1